# Altium PCB main.PcbDoc
Units mm, origin at the board's own origin, x right, y up, seen from the top; angles counter-clockwise.
Board outline 36 x 49 mm, 2 copper layers (Top Layer, Bottom Layer); 17 components, 33 nets, 85 pads, 7 vias.
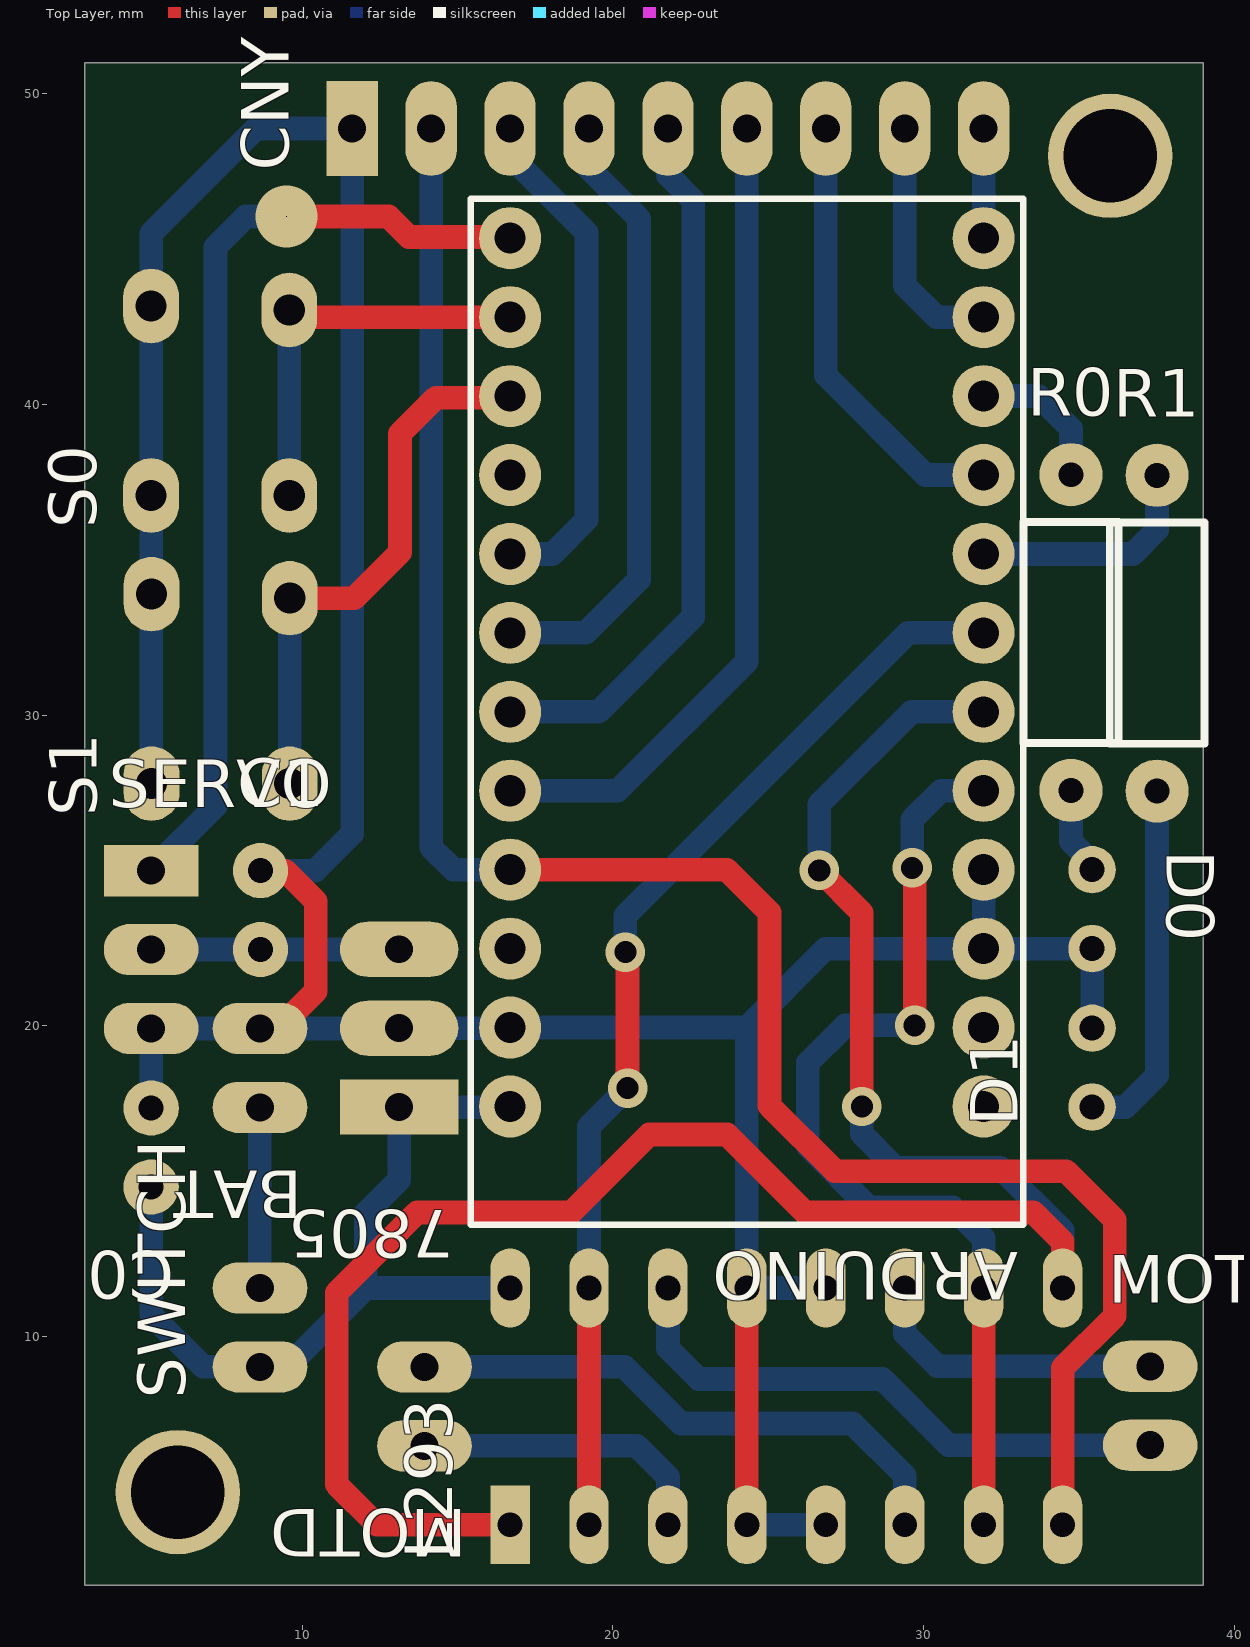
[diagram p0: Top Layer view]
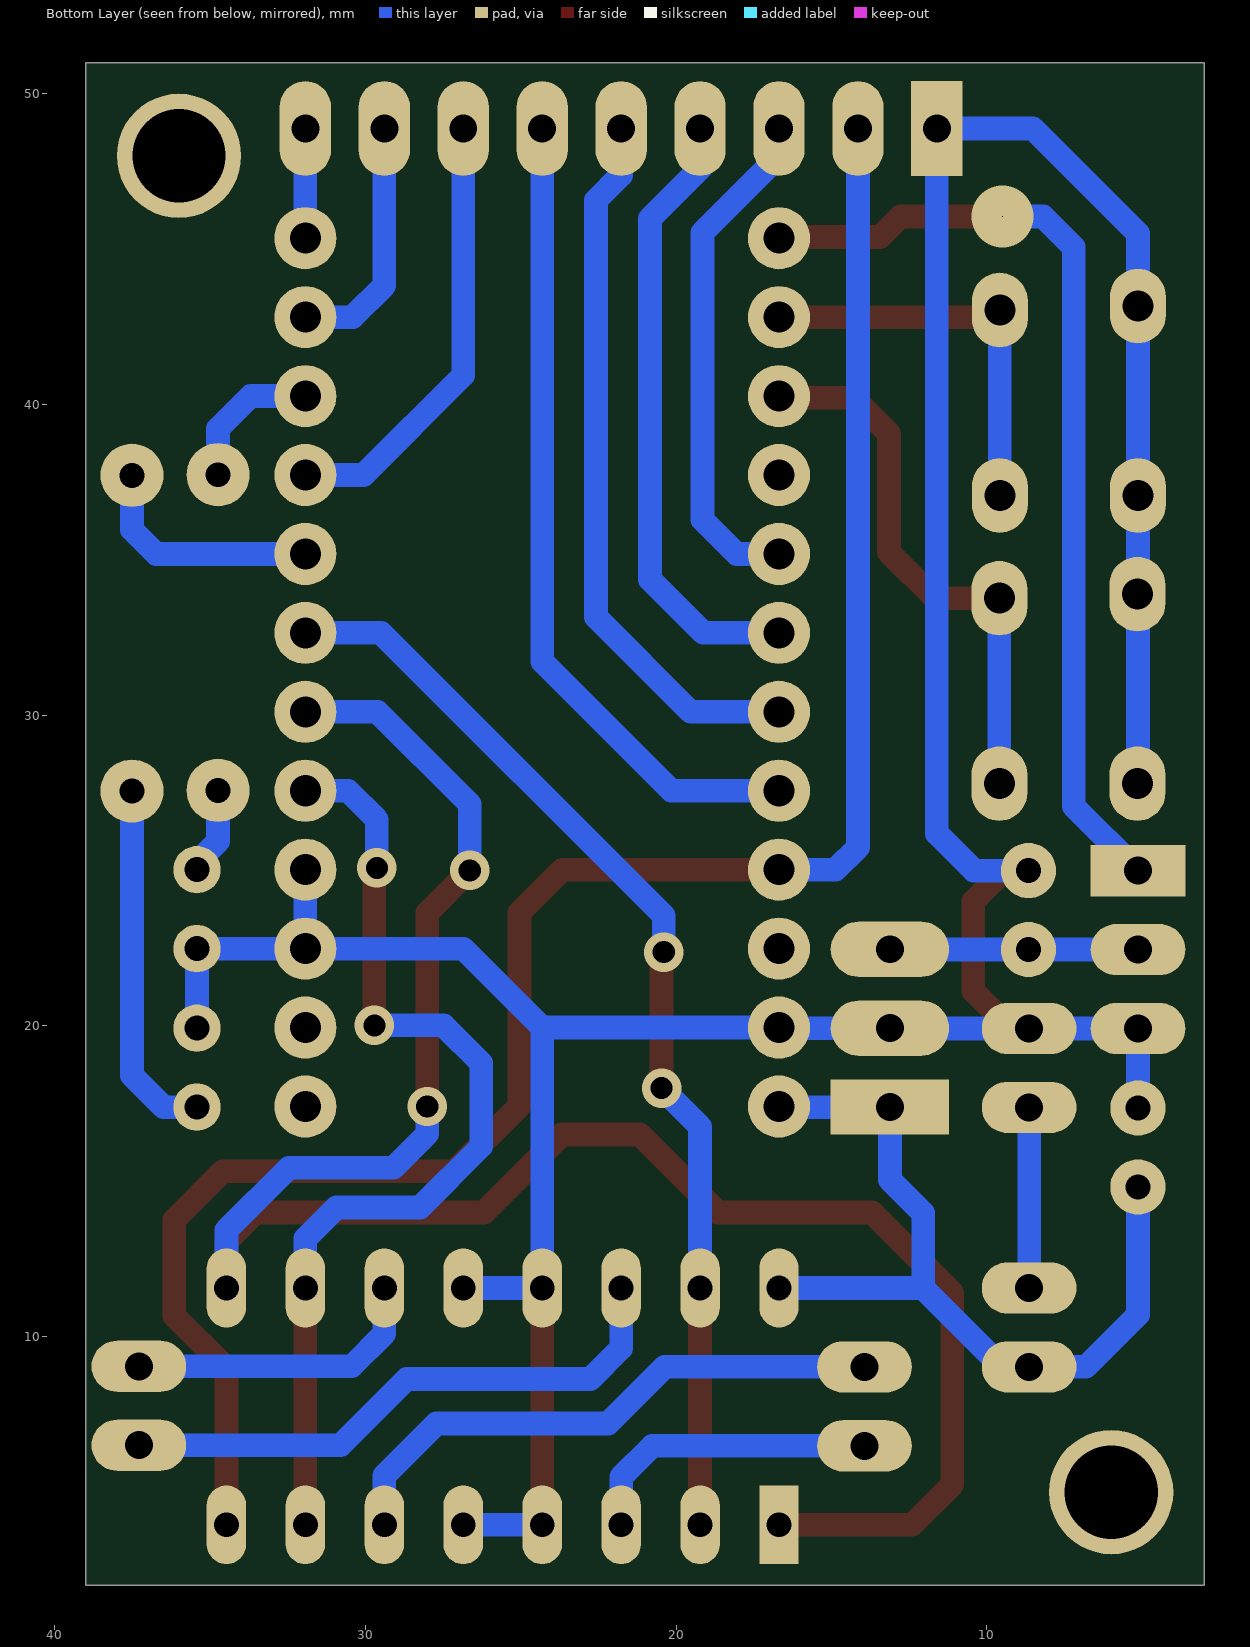
[diagram p1: Bottom Layer view, seen from below]
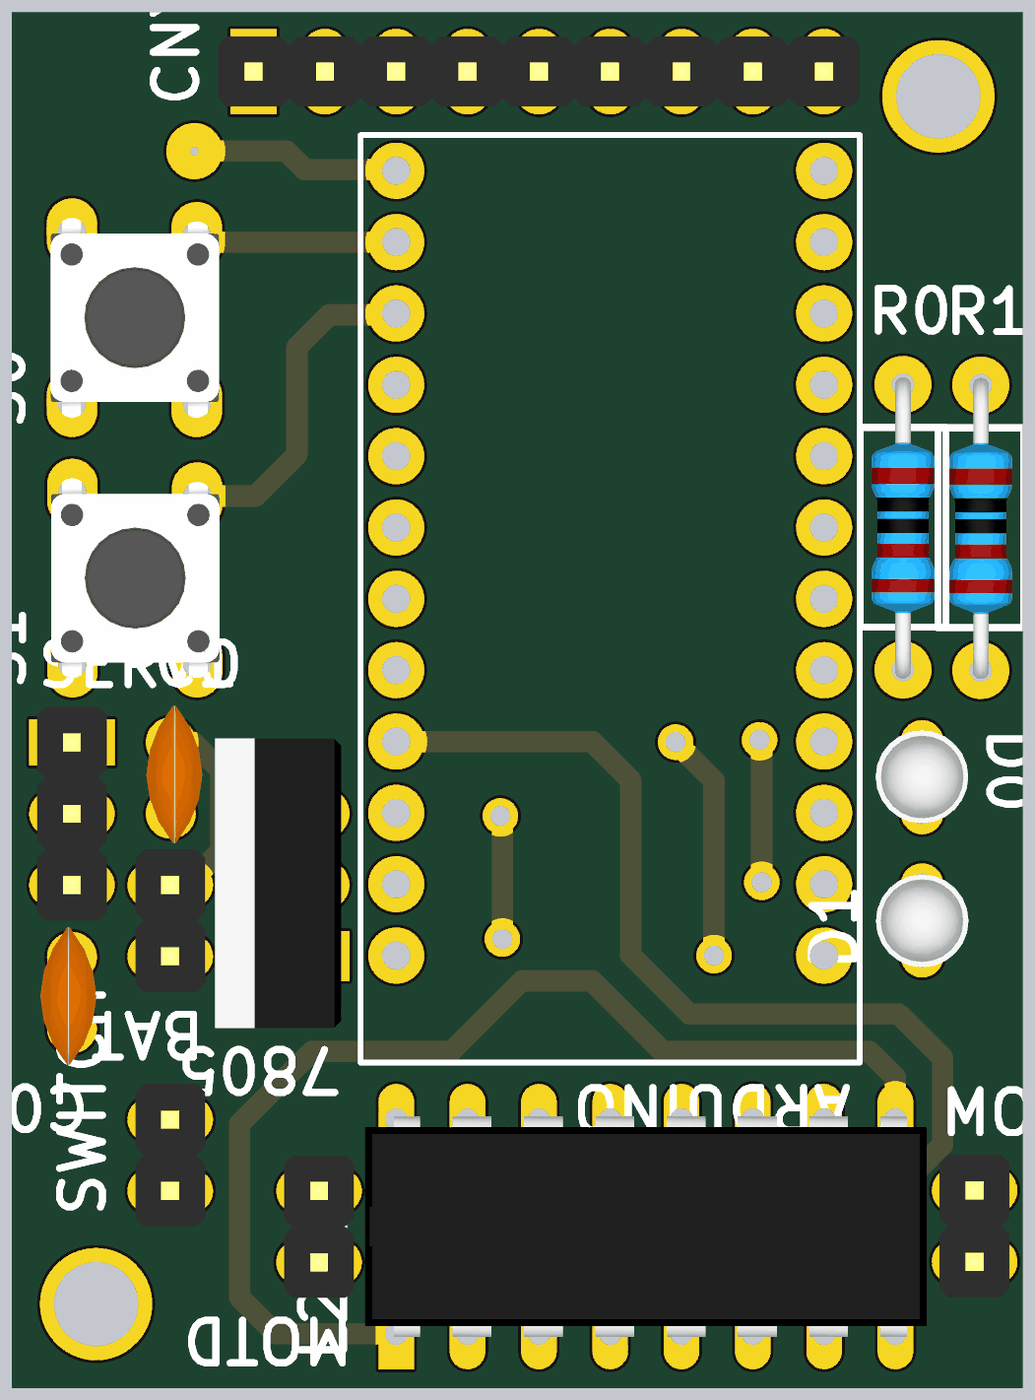
[diagram p2: 3D render of the assembled board from above, using the file's embedded part models]

## Layer stack, top to bottom
Top Solder: solder mask 0.0102, Solder Resist, Dk 3.5
Top Layer: signal copper 0.0356
Dielectric 1: dielectric 0.32, FR-4, Dk 4.8
Bottom Layer: signal copper 0.0356
Bottom Solder: solder mask 0.0102, Solder Resist, Dk 3.5

## Board outline
3,2 3,51 39,51 39,2

## Design rules (kind name [scope] priority, off if disabled: settings)
Clearance [All] p1: gap=0.254
PolygonConnect [All] p1: connectstyle=Relief reliefconductorwidth=0.254 reliefentries=4 polygonreliefangle="90 Angle" airgapwidth=0.254
RoutingVias [All] p1: holewidth=0.711 width=1.27 viastyle="Through Hole" minholewidth=0.711 minwidth=1.27 maxholewidth=0.711 maxwidth=1.27
SolderMaskExpansion [All] p1: expansion=0.102
Width [All] p1: maxlimit=0.762 minlimit=0.762 preferedwidth=0.762
30 further rules are at their usual default settings.

## Classes and differential pairs
component class main: 7805 BAT C0 C1 D0 D1 L293 MOTD MOTI R0 R1 S0 S1 SERVO SWITCH

## Components (designator, comment, footprint, x,y, rotation, side; value= is the part's Value field where it differs from the comment)
7805 "LM78XX" TO-220-STRAIGHT 13.12,17.39 r180 top
ARDUINO "PROMICRO" PROMICRO 24.31,30.11 r180 top
BAT "" "HEADER 1x2" 8.64,18.65 r180 top
C0 "CAP-CER" CAP-CER 5.14,15.709 r270 top
C1 "CAP-CER" CAP-CER 8.66,24.111 r90 top
CNY "" "HEADER 1x9" 11.61,48.88 r90 top
D0 "LED" LED-3MM-RED 35.42,23.76 r270 top
D1 "LED" LED-3MM-GREEN 35.42,18.66 r90 top
L293 "L293" DIP16 16.69,3.95 r90 top
MOTD "" "HEADER 1x2" 13.94,7.76 r180 top
MOTI "" "HEADER 1x2" 37.29,7.78 r0 top
R0 "RES" RES-Axial-400mil 34.74,27.58 r90 top
R1 "RES" RES-Axial-400mil 37.51,27.56 r90 top
S0 "BUTTON_SMALL_4PIN" TACT_SWITCH-SMALL-4PIN 9.585,37.579 r90 top
S1 "BUTTON_SMALL_4PIN" TACT_SWITCH-SMALL-4PIN 9.6,28.308 r90 top
SERVO "" "Header 1x3" 5.14,25 r0 top
SWITCH "" "HEADER 1x2" 8.64,10.3 r180 top

## Footprints (in the part's own frame and the unit in brackets; to place one, negate y for a bottom-side part, rotate by r counter-clockwise, add the part's x,y. Pads: shape width x height; smd on the part's side, far side on the other; paste and mask are expansions set on the pad)
CAP-CER [mil]
  round 70 hole 31.5: 1(-65,0) 2(35,0)
  body extent -107,-44 87,34, height 207
DIP16 [mm]
  rect 2.54x1.27 hole 0.8: 1(0,0)
  oval 2.54x1.27 hole 0.8: 2(0,-2.54) 3(0,-5.08) 4(0,-7.62) 5(0,-10.16) 6(0,-12.7) 7(0,-15.24) 8(0,-17.78) 9(7.62,-17.78) 10(7.62,-15.24) 11(7.62,-12.7) 12(7.62,-10.16) 13(7.62,-7.62) 14(7.62,-5.08) 15(7.62,-2.54) 16(7.62,0)
  body extent -0.12,-18.89 7.75,1.11, height 5.1
"HEADER 1x2" [mil]
  oval 120x65 hole 35.43: 1(0,50) 2(0,-50)
  body extent -49,-100 49,100, height 336
"Header 1x3" [mil]
  rect 120x65 hole 35.43: 1(0,0)
  oval 120x65 hole 35.43: 2(0,-100) 3(0,-200)
  body extent -49,-250 49,50, height 336
"HEADER 1x9" [mil]
  rect 120x65 hole 35.43: 1(0,0)
  oval 120x65 hole 35.43: 2(0,-100) 3(0,-200) 4(0,-300) 5(0,-400) 6(0,-500) 7(0,-600) 8(0,-700) 9(0,-800)
  body extent -49,-850 49,50, height 336
LED-3MM-GREEN [mil]
  round 60 hole 31.5: A(-50,0) K(50,0)
  body extent -66,-65 64,65, height 217
LED-3MM-RED [mil]
  round 60 hole 31.5: A(-50,0) K(50,0)
  body extent -66,-65 64,65, height 217
PROMICRO [mm]
  round 2 hole 1: 1(-7.62,-15.24) 2(-7.62,-12.7) 3(-7.62,-10.16) 4(-7.62,-7.62) 5(-7.62,-5.08) 6(-7.62,-2.54) 7(-7.62,0) 8(-7.62,2.54) 9(-7.62,5.08) 10(-7.62,7.62) 11(-7.62,10.16) 12(-7.62,12.7) 13(7.62,12.7) 14(7.62,10.16) 15(7.62,7.62) 16(7.62,5.08) 17(7.62,2.54) 18(7.62,0) 19(7.62,-2.54) 20(7.62,-5.08) 21(7.62,-7.62) 22(7.62,-10.16) 23(7.62,-12.7) 24(7.62,-15.24)
  silkscreen extent -8.89,-16.51 8.89,16.51
RES-Axial-400mil [mil]
  round 80 hole 31.5: 1(0,0) 2(400,0)
  silkscreen extent 60,-60 340,60, body extent -12,-44 410,44, height 94
TACT_SWITCH-SMALL-4PIN [mm]
  oval 2.4x1.8 hole 1: 1(-0.508,4.445) 1(5.588,4.445) 2(-0.508,0) 2(5.461,0)
  body extent -1.45,-0.79 6.53,5.21, height 5.15
TO-220-STRAIGHT [mm]
  rect 3.81x1.778 hole 0.9: 1(0,0)
  oval 3.81x1.778 hole 0.9: 2(0,-2.54) 3(0,-5.08)
  body extent -1.61,-7.75 2.88,2.55, height 16.8

## Part data
BAT MOTD MOTI SWITCH: library part "Header 1x2"
CNY: library part "Header 1x9"
SERVO: library part "Header 1x3"

## Free pads (board coordinates)
  round 4 hole 3: 2(36,48) 3(6,5)

## Via types
v1: diameter 1.27, hole 0.711, Top Layer to Bottom Layer, 6 vias
v2: diameter 2, hole 0, Top Layer to Bottom Layer, 1 vias

## Nets (pads, with @x,y where several pads share a name; then routed paths per layer and width w, separated by ;. In a path a pad name is that pad's centre, name@x,y a point inside that pad or via, vN(x,y) a via of type N, cw(c..) or ccw(c..) an arc to the next point about the centre after c; other vN are vias at no path point)
BAT: 7805.1 ARDUINO.13 C0.2 L293.16 SWITCH.1 | length 27.2
  Bottom Layer w0.762: C0.2 5.14,10.71 6.82,9.03 SWITCH.1 9.51,9.03 12.05,11.57 ; L293.16 12.05,11.57 ; ARDUINO.13 16.67,17.39 7805.1 13.12,15.05 12.05,13.98 12.05,11.57
BTN0: ARDUINO.23 S0.2 | length 13.3
  Top Layer w0.762: S0.2@9.585,42.81 ARDUINO.23
  Bottom Layer w0.762: S0.2@9.585,36.841 9.585,37.071 S0.2@9.585,43.02
BTN1: ARDUINO.22 S1.2 | length 18
  Top Layer w0.762: S1.2@9.6,33.769 11.679,33.769 13.15,35.24 13.15,39.06 14.31,40.22 16.64,40.22 ARDUINO.22
  Bottom Layer w0.762: S1.2@9.6,27.8 S1.2@9.6,33.769
CNY1: ARDUINO.20 CNY.3 | length 16.5
  Bottom Layer w0.762: ARDUINO.20 18.05,35.19 19.15,36.29 19.15,45.53 16.69,47.99 CNY.3
CNY2: ARDUINO.19 CNY.4 | length 20
  Bottom Layer w0.762: ARDUINO.19 19.12,32.65 20.84,34.37 20.84,45.98 19.23,47.59 CNY.4
CNY3: ARDUINO.18 CNY.5 | length 23.2
  Bottom Layer w0.762: ARDUINO.18 19.53,30.11 22.58,33.16 22.58,46.57 21.77,47.38 CNY.5
CNY4: ARDUINO.17 CNY.6 | length 26.5
  Bottom Layer w0.762: ARDUINO.17 20.15,27.57 24.31,31.73 CNY.6
CNY5: ARDUINO.4 CNY.7 | length 14.3
  Bottom Layer w0.762: CNY.7 26.85,40.94 30.06,37.73 ARDUINO.4
CNY6: ARDUINO.2 CNY.8 | length 8
  Bottom Layer w0.762: CNY.8 29.39,43.83 30.41,42.81 ARDUINO.2
CNY7: ARDUINO.1 CNY.9 | length 3.5
  Bottom Layer w0.762: ARDUINO.1 CNY.9
GND: 7805.2 ARDUINO.9 ARDUINO.10 ARDUINO.14 BAT.2 C0.1 C1.2 CNY.1 D0.K D1.K L293.4 L293.5 L293.12 L293.13 S0.1 S1.1 SERVO.3 | length 119.2
  Top Layer w0.762: BAT.2 9.24,19.92 10.44,21.12 10.44,24.01 9.45,25 C1.2 ; L293.4 L293.13
  Bottom Layer w0.762: C0.1 SERVO.3 BAT.2 ; S1.1@5.155,27.8 5.14,27.815 5.14,37.071 5.14,43.167 5.14,45.5 8.52,48.88 CNY.1 11.61,26.19 10.42,25 C1.2 ; BAT.2@8.66,19.94 BAT.2 ; L293.4 L293.5 ; L293.12 L293.13 24.31,19.95 ; ARDUINO.9 ARDUINO.10 ; D1.K D0.K ARDUINO.10 ; BAT.2 13.11,19.92 7805.2 16.67,19.93 ARDUINO.14 24.31,19.95 ; 24.31,19.95 26.85,22.49 ARDUINO.10
LED0: ARDUINO.3 R0.2 | length 4.7
  Bottom Layer w0.762: ARDUINO.3 33.69,40.27 34.74,39.22 R0.2
LED1: ARDUINO.5 R1.2 | length 7.7
  Bottom Layer w0.762: ARDUINO.5 36.73,35.19 37.51,35.97 R1.2
M_A: ARDUINO.6 L293.2 L293.15 | length 35.4
  Top Layer w0.762: L293.2 L293.15 ; v1(20.4,22.38) 20.47,22.31 v1(20.47,18)
  Bottom Layer w0.762: L293.15 19.23,16.76 v1(20.47,18) ; v1(20.4,22.38) 20.4,23.55 29.5,32.65 ARDUINO.6
M_B: ARDUINO.8 L293.7 L293.10 | length 32.1
  Top Layer w0.762: v1(29.63,25.09) 29.71,25.01 v1(29.71,20.02) ; L293.7 L293.10
  Bottom Layer w0.762: v1(29.63,25.09) 29.63,26.64 30.56,27.57 ARDUINO.8 ; v1(29.71,20.02) 27.48,20.02 26.27,18.81 26.27,16.13 28.24,14.16 30.93,14.16 31.93,13.16 L293.10
M_PWM: ARDUINO.7 L293.1 L293.9 | length 68
  Top Layer w0.762: L293.1 12.41,3.95 11.11,5.25 11.11,11.41 13.7,14 18.657,14 21.167,16.51 23.67,16.51 26.18,14 33.53,14 34.47,13.06 L293.9 ; v1(26.64,25.01) 28.01,23.64 v1(28.01,17.41)
  Bottom Layer w0.762: v1(26.64,25.01) 26.64,27.14 29.61,30.11 ARDUINO.7 ; v1(28.01,17.41) 28.01,16.53 29.1,15.44 32.46,15.44 34.47,13.43 L293.9
NetBAT_1: BAT.1 SWITCH.2 | length 5.8
  Bottom Layer w0.762: SWITCH.2 BAT.1
NetCNY1_A: 
NetCNY2_A: 
NetCNY3_A: 
NetCNY4_A: 
NetCNY5_A: 
NetCNY6_A: 
NetCNY7_A: 
NetD0_A: D0.A R0.1 | length 2.8
  Bottom Layer w0.762: R0.1 34.74,25.94 35.42,25.26 D0.A
NetD1_A: D1.A R1.1 | length 11.7
  Bottom Layer w0.762: D1.A 36.49,17.39 37.51,18.41 R1.1
NetL293_3: L293.3 MOTD.1 | length 9.8
  Bottom Layer w0.762: MOTD.1 20.77,6.49 21.77,5.49 L293.3
NetL293_6: L293.6 MOTD.2 | length 18.5
  Bottom Layer w0.762: MOTD.2 20.37,9.03 22.19,7.21 27.71,7.21 29.39,5.53 L293.6
NetL293_11: L293.11 MOTI.1 | length 9.8
  Bottom Layer w0.762: L293.11 29.39,10.1 30.44,9.05 MOTI.1
NetL293_14: L293.14 MOTI.2 | length 18.8
  Bottom Layer w0.762: L293.14 21.77,9.63 22.76,8.64 28.67,8.64 30.8,6.51 MOTI.2
SPWM: ARDUINO.24 SERVO.1 | length 31.1
  Top Layer w0.762: v2(9.5,46.05) 12.78,46.05 13.44,45.39 16.59,45.39 16.62,45.42 ARDUINO.24
  Bottom Layer w0.762: SERVO.1 7.21,27.07 7.21,45.07 8.19,46.05 v2(9.5,46.05)
VCC: ARDUINO.16 CNY.2 L293.8 | length 64.2
  Top Layer w0.762: ARDUINO.16 23.66,25.03 25.04,23.65 25.04,17.43 27.14,15.33 34.58,15.33 36.15,13.76 36.15,10.674 34.47,8.994 L293.8
  Bottom Layer w0.762: CNY.2 14.15,25.75 14.87,25.03 ARDUINO.16
VSERVO: 7805.3 C1.1 SERVO.2 | length 8
  Bottom Layer w0.762: SERVO.2 C1.1 13.11,22.46 7805.3
pads on no net: ARDUINO.11 ARDUINO.12 ARDUINO.15 ARDUINO.21

## Silkscreen, mask and mechanical layers (free items; w line width, h text height)
Mechanical 1:
  lines w0.254: 3,2 3,17 3,51 39,51 39,17 39,2 3,2